# EAGLE board BSPD (EAGLE 8.6.2)
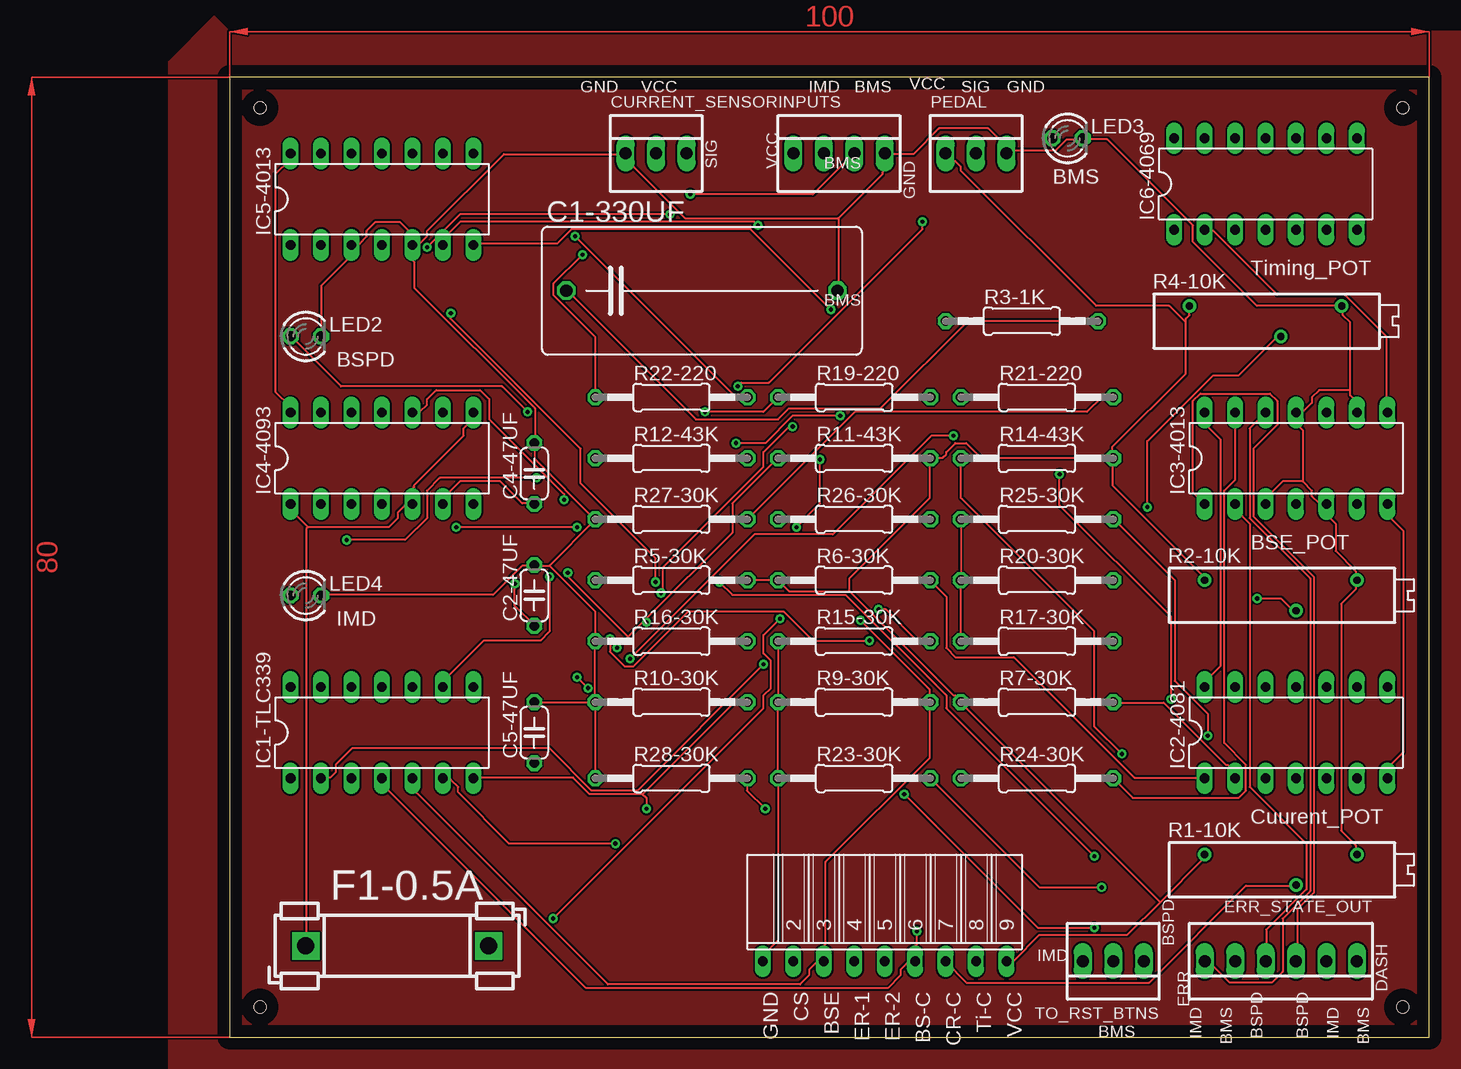
[diagram p0: board, top side]
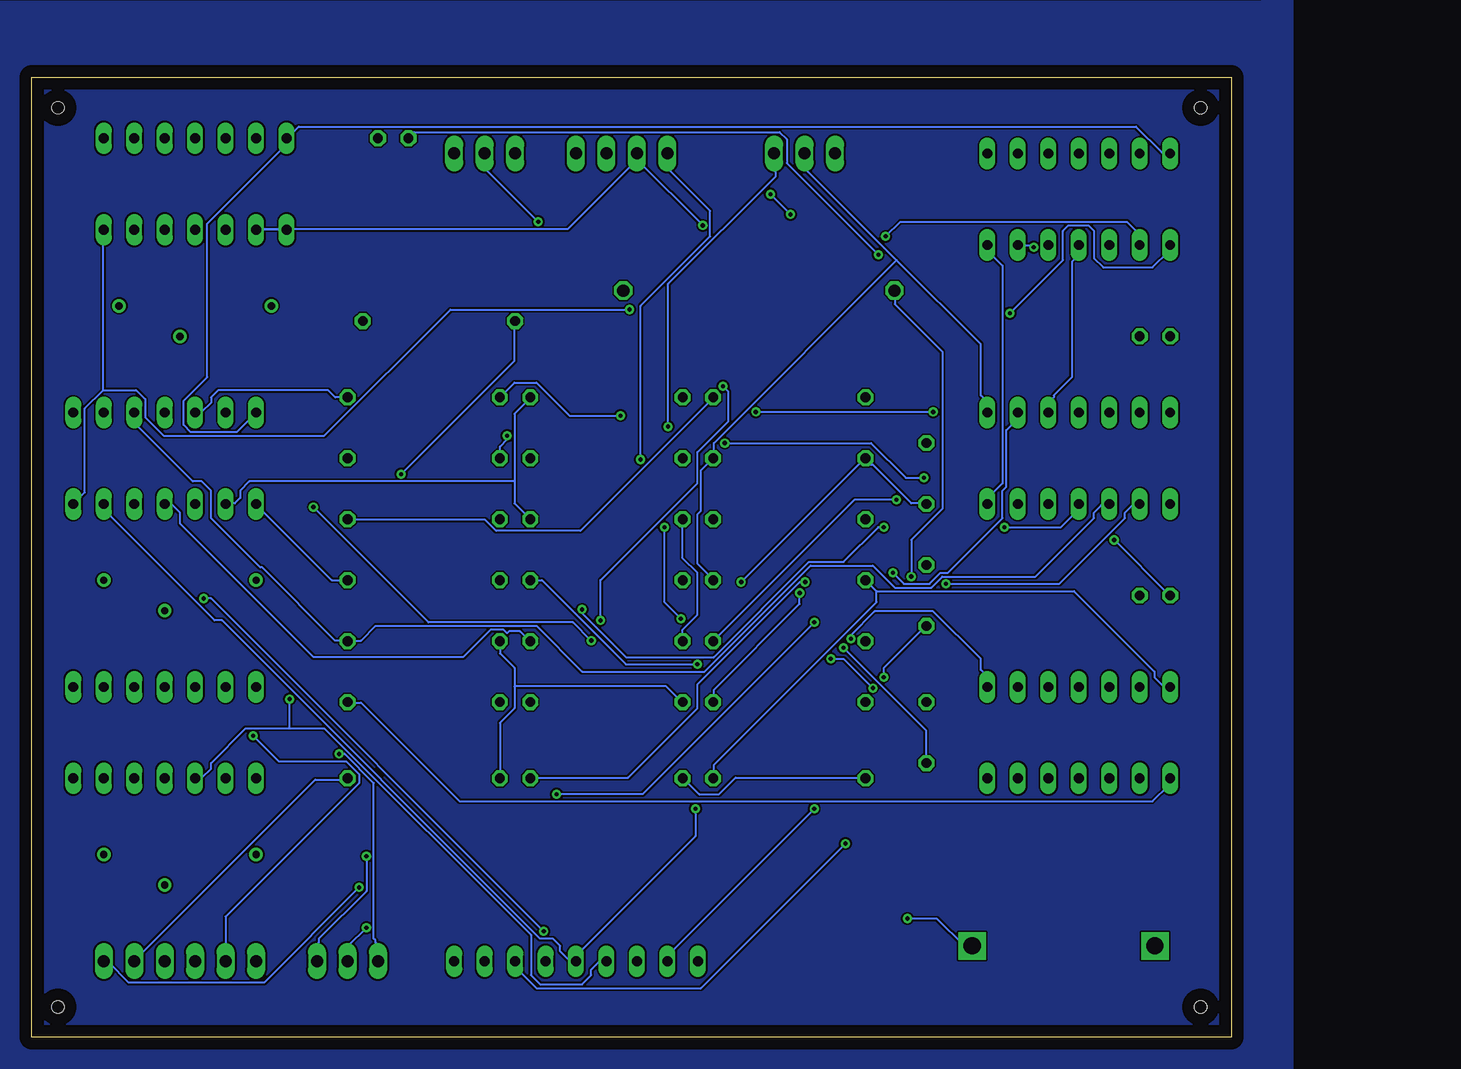
[diagram p1: board, bottom side, seen from below]

Size 100 x 80 mm. Coordinates in mm from the lower left corner, seen from the top.
Outline: 0,0 100,0 100,80 0,80 0,0
Copper layers (1*16): Top 0.035mm / dielectric 1.5mm / Bottom 0.035mm
Design rules "default": minimum track width 6mil, minimum drill 0.35mm, track to track 6mil, track to pad 6mil, pad to pad 6mil, via to via 6mil, smd to smd 6mil, copper to edge 40mil, drill to drill 6mil, minimum pad ring 10mil, minimum via ring 8mil, stop-mask expansion 4mil, vias tented up to drill 0mil, thermal gap 10mil
Holes 1 mm at 2.54,77.47 2.54,2.54 97.79,77.47 97.79,2.54

## Footprints (pad centres in the part's own frame; a part is rotated, then mirrored left to right if it is on the bottom)
C225-108X268 = drill 1.016 octagon: 1 -11.303,0; 2 11.303,0
C050-024X044 = drill 0.813 octagon: 1 -2.54,0; 2 2.54,0
22-23-2031 = drill 1 long: 1 -2.54,0; 2 0,0; 3 2.54,0
22-23-2061 = drill 1 long: 1 -6.35,0; 2 -3.81,0; 3 -1.27,0; 4 1.27,0; 5 3.81,0; 6 6.35,0
FUSE_HOLDER_5X20MM = drill 1.422 pad 2.286 square: 1 0,0; 2 15.24,0
FE09W = drill 0.813 long: 1 -10.16,0; 2 -7.62,0; 3 -5.08,0; 4 -2.54,0; 5 0,0; 6 2.54,0; 7 5.08,0; 8 7.62,0; 9 10.16,0
DIL14 = drill 0.813 long: 1 -7.62,-3.81; 2 -5.08,-3.81; 3 -2.54,-3.81; 4 0,-3.81; 5 2.54,-3.81; 6 5.08,-3.81; 7 7.62,-3.81; 8 7.62,3.81; 9 5.08,3.81; 10 2.54,3.81; 11 0,3.81; 12 -2.54,3.81; 13 -5.08,3.81; 14 -7.62,3.81
22-23-2041 = drill 1 long: 1 -3.81,0; 2 -1.27,0; 3 1.27,0; 4 3.81,0
LED3MM = drill 0.813 octagon: A -1.27,0; K 1.27,0
RTRIM3006P = drill 0.61: 1 -7.62,1.27; 2 0,-1.27; 3 5.08,1.27
0207/12 = drill 0.813 octagon: 1 -6.35,0; 2 6.35,0

## Placement (x,y rotation side)
C1-330UF  330u  [C225-108X268]  39.37,62.23 0 top
C2-47UF  47uF  [C050-024X044]  25.4,36.83 90 top
C4-47UF  47uF  [C050-024X044]  25.4,46.99 90 top
C5-47UF  47uF  [C050-024X044]  25.4,25.4 90 top
CURRENT_SENSOR  22-23-2031  [22-23-2031]  35.56,73.66 0 top
ERR_STATE_OUT  ERR_STATE_OUT  [22-23-2061]  87.63,6.35 180 top
F1-0.5A  FUSEBLANK_5X20MM  [FUSE_HOLDER_5X20MM]  6.35,7.62 0 top
GND  [FE09W]  54.61,6.35 0 top
IC1-TLC339  TLC339P  [DIL14]  12.7,25.4 0 top
IC2-4081  4081N  [DIL14]  88.9,25.4 0 top
IC3-4013  4013N  [DIL14]  88.9,48.26 0 top
IC4-4093  4093N  [DIL14]  12.7,48.26 0 top
IC5-4013  4013N  [DIL14]  12.7,69.85 0 top
IC6-4069  4069N  [DIL14]  86.36,71.12 0 top
INPUTS  22-23-2041  [22-23-2041]  50.8,73.66 0 top
LED2  [LED3MM]  6.35,58.42 0 top
LED3  [LED3MM]  69.85,74.93 0 top
LED4  [LED3MM]  6.35,36.83 0 top
PEDAL  22-23-2031  [22-23-2031]  62.23,73.66 0 top
R1-10K  [RTRIM3006P]  88.9,13.97 0 top
R2-10K  [RTRIM3006P]  88.9,36.83 0 top
R3-1K  1k  [0207/12]  66.04,59.69 0 top
R4-10K  [RTRIM3006P]  87.63,59.69 0 top
R5-30K  30k  [0207/12]  36.83,38.1 0 top
R6-30K  30k  [0207/12]  52.07,38.1 0 top
R7-30K  30k  [0207/12]  67.31,27.94 0 top
R9-30K  30k  [0207/12]  52.07,27.94 0 top
R10-30K  30k  [0207/12]  36.83,27.94 0 top
R11-43K  43k  [0207/12]  52.07,48.26 0 top
R12-43K  43k  [0207/12]  36.83,48.26 0 top
R14-43K  43k  [0207/12]  67.31,48.26 0 top
R15-30K  30k  [0207/12]  52.07,33.02 0 top
R16-30K  30k  [0207/12]  36.83,33.02 0 top
R17-30K  30k  [0207/12]  67.31,33.02 0 top
R19-220  220  [0207/12]  52.07,53.34 0 top
R20-30K  30k  [0207/12]  67.31,38.1 0 top
R21-220  220  [0207/12]  67.31,53.34 0 top
R22-220  220  [0207/12]  36.83,53.34 0 top
R23-30K  30k  [0207/12]  52.07,21.59 0 top
R24-30K  30k  [0207/12]  67.31,21.59 0 top
R25-30K  30k  [0207/12]  67.31,43.18 0 top
R26-30K  30k  [0207/12]  52.07,43.18 0 top
R27-30K  30k  [0207/12]  36.83,43.18 0 top
R28-30K  30k  [0207/12]  36.83,21.59 0 top
TO_RST_BTNS  22-23-2031  [22-23-2031]  73.66,6.35 180 top

## Library data of the parts
C1-330UF C2-47UF C4-47UF C5-47UF = rcl; SPICEPREFIX: C
CURRENT_SENSOR PEDAL TO_RST_BTNS = con-molex; MF: MOLEX; MPN: 22-23-2031; OC_FARNELL: 1462950; OC_NEWARK: 30C0862
ERR_STATE_OUT = con-molex; MF: MOLEX; MPN: 22-23-2061; OC_FARNELL: 1462922; OC_NEWARK: 27C1933
F1-0.5A = fuse; OC_FARNELL: unknown; OC_NEWARK: unknown
GND = con-lsta; OC_FARNELL: unknown; OC_NEWARK: unknown
IC1-TLC339 = linear
IC2-4081 IC3-4013 IC4-4093 IC5-4013 IC6-4069 = 40xx
INPUTS = con-molex; MF: MOLEX; MPN: 22-23-2041; OC_FARNELL: 1462920; OC_NEWARK: 38C0355
LED2-LED4 = led
R1-10K R2-10K R4-10K = rcl; SPICEMODEL: X; SPICEPREFIXL: POT
R3-1K R5-30K R6-30K R7-30K R9-30K R10-30K R11-43K R12-43K R14-43K R15-30K R16-30K R17-30K R19-220 R20-30K R21-220 R22-220 R23-30K R24-30K R25-30K R26-30K R27-30K R28-30K = rcl; SPICEPREFIX: R

## Nets
BMS: IC5-4013.6 INPUTS.3
BMS_DASH: ERR_STATE_OUT.1 IC5-4013.1 R23-30K.2
BMS_ERR: ERR_STATE_OUT.5 IC5-4013.2 R22-220.2 R25-30K.2
BMS_RST: IC4-4093.10 IC5-4013.4 R16-30K.2
BSE: GND.3 IC1-TLC339.5 PEDAL.2 R9-30K.2
BSE_POT: GND.6 IC1-TLC339.4 R2-10K.2
BSPD_DASH: ERR_STATE_OUT.3 IC3-4013.1 R20-30K.2
BSPD_ERR: ERR_STATE_OUT.4 IC3-4013.2 R19-220.2 R26-30K.2
BSPD_RST: IC3-4013.4 IC4-4093.4 R15-30K.2
CURRENT_POT: GND.7 IC1-TLC339.6 R1-10K.2
CURRENT_SENSOR: CURRENT_SENSOR.3 GND.2 IC1-TLC339.7 R10-30K.2
ERROR_1: GND.4 IC2-4081.3 R3-1K.1
ERROR_2: GND.5 IC1-TLC339.14 IC3-4013.6 R5-30K.1 R28-30K.2
ESO_BMS_RST: C5-47UF.1 IC4-4093.9 R11-43K.1 TO_RST_BTNS.2
ESO_BSPD_RST: C4-47UF.1 IC4-4093.6 R12-43K.1 TO_RST_BTNS.1
ESO_IMD_RST: C2-47UF.1 IC4-4093.2 R14-43K.1 TO_RST_BTNS.3
GND: C1-330UF.2 C2-47UF.2 C4-47UF.2 C5-47UF.2 CURRENT_SENSOR.1 GND.1 IC3-4013.3 IC3-4013.5 IC3-4013.9 IC3-4013.11 IC5-4013.3 IC5-4013.5 INPUTS.4 LED2.K LED3.K LED4.K PEDAL.3 R1-10K.3 R2-10K.3 R4-10K.3 R9-30K.1 R10-30K.1 R15-30K.1 R16-30K.1 R17-30K.1 R20-30K.1 R23-30K.1 R24-30K.1 R25-30K.1 R26-30K.1 R27-30K.1 R28-30K.1
IMD: IC6-4069.1 INPUTS.2
IMD_DASH: ERR_STATE_OUT.2 IC3-4013.13 R24-30K.2
IMD_ERR: ERR_STATE_OUT.6 IC3-4013.12 R21-220.2 R27-30K.2
IMD_RST: IC3-4013.10 IC4-4093.3 R17-30K.2
N$1: IC1-TLC339.2 IC2-4081.1 R6-30K.2
N$2: IC1-TLC339.1 IC2-4081.2 R7-30K.2
N$4: F1-0.5A.2 INPUTS.1
N$5: IC3-4013.8 IC6-4069.2
N$6: C1-330UF.1 IC1-TLC339.9 R3-1K.2
N$9: LED3.A R22-220.1
N$15: LED4.A R21-220.1
N$21: LED2.A R19-220.1
TIME_POT: GND.8
TIMED_POT: IC1-TLC339.8 R4-10K.2
V+: IC1-TLC339.3
V-: IC1-TLC339.12
VCC: CURRENT_SENSOR.2 F1-0.5A.1 GND.9 IC4-4093.1 IC4-4093.5 IC4-4093.8 PEDAL.1 R1-10K.1 R2-10K.1 R4-10K.1 R5-30K.2 R6-30K.1 R7-30K.1 R11-43K.2 R12-43K.2 R14-43K.2
VDD: IC2-4081.14 IC3-4013.14 IC4-4093.14 IC5-4013.14 IC6-4069.14
VSS: IC2-4081.7 IC3-4013.7 IC4-4093.7 IC5-4013.7 IC6-4069.7

## Tracks (layer width: path | path; a pad name or v marks a point on that pad's centre or on a via)
BMS  (via drill 0.35)
  Top 0.152: v16.46,65.84 19.2,68.58 v36.73,68.58 | v38.41,70.26 48.62,70.26 51.97,73.61 INPUTS.3
  Bottom 0.152: v16.46,65.84 16.61,65.99 17.68,65.99 IC5-4013.6 | v38.41,70.26 v36.73,68.58
BMS_DASH  (via drill 0.35)
  Top 0.152: v18.44,60.35 18.44,59.89 29.26,49.07 29.26,46.18 35.51,39.93 v35.51,37.95 | v72.69,12.5 67.51,12.5 R23-30K.2
  Bottom 0.152: v18.44,60.35 14.02,64.77 14.02,67.21 13.56,67.67 11.89,67.67 11.43,67.21 11.43,64.92 10.67,64.16 6.55,64.16 5.18,65.53 5.18,65.99 IC5-4013.1 | v35.51,37.95 35.97,37.95 44.5,29.41 44.5,27.43 50.29,21.64 58.37,21.64 R23-30K.2 | v72.69,12.5 80.62,4.57 91.9,4.57 93.57,6.25 93.88,6.25 ERR_STATE_OUT.1
BMS_ERR  (via drill 0.35)
  Top 0.152: v28.8,66.75 42.22,53.34 R22-220.2 | v81.53,25.15 81.53,26.98 78.79,29.72 78.79,38.1 73.76,43.13 R25-30K.2
  Bottom 0.152: IC5-4013.2 7.62,66.9 8.69,67.97 27.58,67.97 v28.8,66.75 | R25-30K.2 73.61,43.13 62.18,43.13 61.27,42.22 54.25,42.22 43.13,53.34 R22-220.2 | ERR_STATE_OUT.5 83.82,10.06 72.69,21.18 72.69,21.95 73.76,23.01 79.4,23.01 v81.53,25.15
BMS_RST  (via drill 0.35)
  Top 0.152: v27.89,44.81 27.89,45.26 21.64,51.51 21.64,53.19 20.88,53.95 17.22,53.95 16.46,53.19 16.46,52.73 15.85,52.12 15.24,52.12 IC4-4093.10
  Bottom 0.152: IC4-4093.10 15.24,52.88 14.78,53.34 14.78,53.49 13.26,55.02 13.26,64.62 12.8,65.08 12.8,65.99 IC5-4013.4 | R16-30K.2 31.39,44.81 v27.89,44.81
BSE  (via drill 0.35)
  Top 0.152: IC1-TLC339.5 15.24,20.73 31.55,4.42 47.55,4.42 48.31,5.18 48.31,5.64 48.92,6.25 49.53,6.25 GND.3 49.53,7.62 49.68,7.77 49.68,14.63 58.37,23.32 58.37,27.89 R9-30K.2 58.37,28.04 58.37,28.96 v52.58,34.75 | v57.76,67.97 57.76,67.36 44.96,54.56 42.67,54.56 v42.37,54.25
  Bottom 0.152: v57.76,67.97 62.18,72.39 62.18,73.61 PEDAL.2 | v42.37,54.25 41.91,53.8 41.91,51.36 44.5,48.77 44.5,46.18 52.58,38.1 v52.58,34.75
BSE_POT  (via drill 0.35)
  Top 0.152: v85.65,36.58 87.63,36.58 88.54,35.66 88.85,35.66 R2-10K.2 | v57.3,8.84 57.3,7.77 57.15,7.62 GND.6 57.15,6.25 56.54,6.25 55.93,5.64 55.93,5.18 54.86,4.12 29.72,4.12 12.8,21.03 12.8,21.49 IC1-TLC339.4
  Bottom 0.152: v85.65,36.58 85.04,36.58 v57.3,8.84
BSPD_DASH
  Top 0.152: IC3-4013.1 80.31,45.41 80.31,53.03 80.92,53.65 86.72,53.65 87.33,53.03 87.33,51.05 85.34,49.07 85.34,43.43 90.37,38.41 90.37,12.04 89,10.67 89,6.4 ERR_STATE_OUT.3
  Bottom 0.152: R20-30K.2 74.98,38.1 81.23,44.35 IC3-4013.1
BSPD_ERR
  Top 0.152: IC3-4013.2 83.82,44.04 85.04,42.82 85.04,20.88 89.76,16.15 89.76,12.34 86.41,8.99 86.41,6.4 ERR_STATE_OUT.4
  Bottom 0.152: R26-30K.2 59.74,44.5 59.74,46.33 | 59.74,46.33 59.74,51.97 58.37,53.34 R19-220.2 | 59.74,46.33 81.84,46.33 82.6,45.57 82.6,44.96 83.06,44.5 83.82,44.5 IC3-4013.2
BSPD_RST  (via drill 0.35)
  Top 0.152: v28.96,42.52 v18.9,42.52 | v54.1,35.66 54.71,35.66 57.3,33.07 58.37,33.07 R15-30K.2
  Bottom 0.152: v18.9,42.52 14.17,42.52 12.8,43.89 12.8,44.35 IC4-4093.4 | v28.96,42.52 29.41,42.52 32.31,39.62 35.2,39.62 43.13,31.7 50.44,31.7 54.1,35.36 v54.1,35.66 | IC3-4013.4 88.85,44.35 88.24,44.35 87.63,43.74 87.63,42.82 76.5,31.7 64.01,31.7 61.72,33.98 60.66,33.98 60.35,33.68 60.2,33.83 59.28,33.83 58.52,33.07 R15-30K.2
CURRENT_POT  (via drill 0.35)
  Top 0.152: v32.16,16.15 23.32,16.15 19.05,20.42 19.05,20.88 18.44,21.49 17.83,21.49 IC1-TLC339.6 | R1-10K.2 88.85,12.65 84.73,12.65 76.66,4.57 61.42,4.57 59.74,6.25 GND.7
  Bottom 0.152: v32.16,16.15 44.2,4.12 57.91,4.12 59.59,5.79 59.59,6.25 GND.7
CURRENT_SENSOR  (via drill 0.35)
  Top 0.152: 34.44,20.27 30.02,20.27 28.65,21.64 20.42,21.64 IC1-TLC339.7 | 34.44,20.27 42.06,27.89 43.13,27.89 R10-30K.2 | v34.75,19.05 34.75,19.96 34.44,20.27 | v46.94,50.9 46.63,50.9 44.5,48.77 44.5,47.55 36.12,39.17 36.12,37.19 v35.97,37.03
  Bottom 0.152: v34.75,19.05 46.94,6.86 46.94,6.4 GND.2 | CURRENT_SENSOR.3 38.1,72.24 37.95,72.08 37.95,71.78 46.94,62.79 v46.94,50.9 | v35.97,37.03 35.97,36.12 43.13,28.96 43.13,28.04 R10-30K.2
ERROR_1  (via drill 0.35)
  Top 0.152: v69.19,46.94 69.19,44.35 78.49,35.05 v78.49,28.19
  Bottom 0.152: 78.49,25.76 82.14,25.76 85.04,22.86 85.04,22.4 85.8,21.64 86.26,21.64 IC2-4081.3 | 78.49,25.76 75.59,25.76 58.37,8.53 58.37,5.18 57.61,4.42 54.1,4.42 53.34,5.18 53.34,5.64 52.73,6.25 52.12,6.25 GND.4 | v69.19,46.94 59.74,56.39 59.74,59.59 R3-1K.1 | 78.49,25.76 v78.49,28.19
ERROR_2  (via drill 0.35)
  Top 0.152: v44.65,19.05 43.13,20.57 43.13,21.49 R28-30K.2
  Bottom 0.152: 29.57,37.19 13.11,37.19 6.4,30.48 6.4,30.02 5.64,29.26 5.18,29.26 IC1-TLC339.14 | R5-30K.1 29.57,37.19 | v44.65,19.05 44.65,16.76 54.56,6.86 54.56,6.4 GND.5 54.71,6.4 55.17,6.4 55.93,7.16 55.93,7.62 56.54,8.23 57.61,8.23 84.12,34.75 84.73,34.75 93.88,43.89 93.88,44.35 IC3-4013.6 | 29.57,37.19 29.57,36.27 43.13,22.71 43.13,21.64 R28-30K.2
ESO_BMS_RST  (via drill 0.35)
  Top 0.152: 34.59,34.75 41.91,42.06 41.91,44.5 45.72,48.31 R11-43K.1 | 34.59,34.75 33.22,33.38 | 33.22,33.38 v32.31,32.46 | v28.19,38.71 28.19,38.41 33.22,33.38 | v72.08,9.14 67.36,9.14 v56.24,20.27 | 34.59,34.75 v34.75,34.59
  Bottom 0.152: v32.31,32.46 25.45,25.6 25.45,22.86 C5-47UF.1 | v28.19,38.71 27.28,37.8 25.15,37.8 24.23,38.71 23.62,38.71 19.05,43.28 19.05,45.57 18.75,45.87 18.75,50.6 17.83,51.51 17.83,51.97 IC4-4093.9 | v72.08,9.14 73.61,7.62 73.61,6.4 TO_RST_BTNS.2 | v56.24,20.27 49.07,20.27 v34.75,34.59
ESO_BSPD_RST  (via drill 0.35)
  Top 0.152: IC4-4093.6 17.83,44.5 17.83,44.96 19.2,46.33 22.55,46.33 24.38,44.5 25.3,44.5 C4-47UF.1 | v72.08,15.09 59.74,27.43 59.74,28.5 51.36,36.88 41.91,36.88 v40.84,37.95
  Bottom 0.152: C4-47UF.1 25.45,44.5 26.67,44.5 29.87,47.7 30.02,47.7 30.48,48.16 R12-43K.1 30.48,48.31 v40.84,37.95 | TO_RST_BTNS.1 76.2,7.77 76.05,7.92 76.05,8.23 72.08,12.19 v72.08,15.09
ESO_IMD_RST  (via drill 0.35)
  Top 0.152: v23.77,37.8 23.77,35.97 25.45,34.29 C2-47UF.1 | R14-43K.1 60.96,44.96 72.08,33.83 72.08,25.91 v74.37,23.62 | v29.87,29.11 v28.96,30.02 | v33.38,31.55 43.74,41.91 50.29,41.91 58.52,50.14 v60.35,50.14
  Bottom 0.152: v23.77,37.8 14.33,37.8 8.84,43.28 8.84,43.74 8.23,44.35 7.62,44.35 IC4-4093.2 | v74.37,23.62 73.91,23.62 71.48,21.18 71.48,8.23 71.32,8.08 71.32,7.92 71.17,7.77 71.17,6.4 TO_RST_BTNS.3 | v28.96,30.02 28.96,30.79 25.45,34.29 C2-47UF.1 | v29.87,29.11 32.31,31.55 v33.38,31.55 | v60.35,50.14 60.35,49.84 60.96,49.23 R14-43K.1
GND
  Top 0.152: 30.48,27.89 R28-30K.1 | 30.48,27.89 25.45,27.89 C5-47UF.2 | 30.48,27.89 R10-30K.1 R16-30K.1 30.48,35.51 26.67,39.32 | LED4.K 7.62,36.88 21.95,36.88 24.38,39.32 25.3,39.32 C2-47UF.2 25.45,39.32 26.67,39.32 | 26.67,39.32 30.48,43.13 | 25.45,49.53 25.45,48.16 30.48,43.13 | 30.48,43.13 R27-30K.1 | R25-30K.1 R20-30K.1 R17-30K.1 | R15-30K.1 R9-30K.1 R23-30K.1 45.72,8.08 44.5,6.86 44.5,6.4 GND.1 | 93.88,38.1 93.88,37.34 92.66,36.12 92.66,17.22 93.88,16 93.88,15.24 R1-10K.3 | 89.46,46.33 87.78,46.33 86.41,44.96 86.41,44.5 IC3-4013.3 | 89.46,46.33 90.22,45.57 90.22,45.11 90.83,44.5 91.44,44.5 IC3-4013.5 91.44,43.59 92.2,42.82 92.2,40.54 93.88,38.86 93.88,38.1 | 93.42,53.95 93.42,53.49 93.88,53.03 93.88,52.12 IC3-4013.9 | 93.42,53.95 93.42,59.59 92.81,60.2 92.81,60.96 R4-10K.3 85.65,60.96 80.31,66.29 80.31,67.67 73.15,74.83 71.17,74.83 LED3.K 71.02,74.83 69.8,74.83 68.89,73.91 64.77,73.91 | 93.42,53.95 90.83,53.95 90.22,53.34 90.22,52.88 89.46,52.12 89,52.12 IC3-4013.11 89,51.97 89,51.05 89.46,50.6 89.46,46.33 | 93.88,38.1 R2-10K.3 | 64.77,73.91 64.77,74.22 63.25,75.74 59.13,75.74 57,73.61 54.71,73.61 INPUTS.4 54.56,73.61 54.56,72.24 54.41,72.08 54.41,71.93 50.75,68.28 | 50.75,68.28 50.75,62.33 C1-330UF.2 | LED2.K 7.62,62.64 10.06,65.08 10.06,65.99 IC5-4013.3 10.21,66.14 10.82,66.14 11.43,66.75 11.43,67.21 12.19,67.97 14.17,67.97 15.24,66.9 15.24,66.14 | 15.24,66.14 15.85,66.14 16.46,66.75 16.46,67.21 22.86,73.61 32.92,73.61 CURRENT_SENSOR.1 33.07,73.61 33.07,73.15 37.95,68.28 50.75,68.28 | 15.24,66.14 IC5-4013.5 15.24,64.77 15.39,64.62 15.39,62.48 25.45,52.43 25.45,49.53
  Top 0.152: 25.45,49.53 C4-47UF.2 | 64.77,73.91 PEDAL.3
  Bottom 0.152: R24-30K.1 60.96,26.21 59.74,27.43 59.74,29.26 | 59.74,29.26 59.74,30.79 60.96,32 R17-30K.1 | R26-30K.1 45.72,39.93 44.5,38.71 44.5,35.2 45.72,33.98 R15-30K.1 | 59.74,29.26 47.09,29.26 45.72,27.89 R9-30K.1 | R28-30K.1 30.48,21.64 41.3,21.64 42.67,20.27 44.35,20.27 45.72,21.64 R23-30K.1
IMD  (via drill 0.35)
  Top 0.152: 17.83,66.14 17.83,66.6 19.2,67.97 43.74,67.97 v44.04,67.67
  Bottom 0.152: 49.53,73.15 v44.04,67.67 | 49.53,73.15 INPUTS.2 49.53,73.61 | 49.53,73.15 55.32,67.36 81.23,67.36 IC6-4069.1
IMD_DASH
  Top 0.152: IC3-4013.13 83.82,46.48 82.91,45.57 82.91,24.54 84.73,22.71 84.73,20.57 84.12,19.96 75.29,19.96 R24-30K.2
  Bottom 0.152: R24-30K.2 73.76,21.49 76.35,21.49 91.44,6.4 ERR_STATE_OUT.2
IMD_ERR
  Top 0.152: R27-30K.2 52.12,52.12 71.48,52.12 72.69,53.34 R21-220.2 | IC3-4013.12 85.04,50.75 85.04,43.28 90.07,38.25 90.07,12.19 87.78,9.91 87.78,5.49 86.87,4.57 83.36,4.57 81.69,6.25 81.38,6.25 ERR_STATE_OUT.6
  Bottom 0.152: R21-220.2 74.68,53.34 75.29,53.95 84.43,53.95 85.04,53.34 85.04,52.88 85.8,52.12 86.26,52.12 IC3-4013.12
IMD_RST
  Bottom 0.152: IC4-4093.3 10.21,44.35 10.82,44.35 11.43,43.74 11.43,43.28 16.31,38.41 24.08,38.41 24.99,37.49 28.04,37.49 29.87,39.32 35.05,39.32 43.89,30.48 54.1,30.48 57.91,34.29 71.32,34.29 72.54,33.07 73.61,33.07 R17-30K.2 73.76,33.07 74.68,33.07 80.77,39.17 80.92,39.17 85.04,43.28 85.04,45.57 85.8,46.33 86.56,46.33 91.44,51.21 IC3-4013.10
N$1  (via drill 0.35)
  Top 0.152: v44.5,31.09 33.98,20.57 30.18,20.57 26.67,24.08 10.21,24.08 8.84,22.71 8.84,22.1 8.38,21.64 7.62,21.64 IC1-TLC339.2 | IC2-4081.1 81.23,21.64 75.44,21.64 65.38,31.7 60.5,31.7 59.74,32.46 59.74,36.73 58.37,38.1 R6-30K.2
  Bottom 0.152: v44.5,31.09 50.44,31.09 57.45,38.1 R6-30K.2
N$2
  Top 0.152: IC2-4081.2 83.82,22.1 83.21,22.71 83.06,22.71 77.88,27.89 73.76,27.89 R7-30K.2
  Bottom 0.152: IC1-TLC339.1 5.18,21.49 5.18,21.03 6.55,19.66 64.31,19.66 72.54,27.89 73.61,27.89 R7-30K.2
N$3
  pour Top: -1.27,85.09 -5.08,81.28 -5.08,-2.54 -3.81,-3.81 104.14,-3.81 104.14,83.82 0,83.82
N$4  (via drill 0.35)
  Top 0.152: v49.23,48.16 49.23,44.5 v47.24,42.52 | v45.87,34.9 44.5,33.53 44.5,32 45.11,31.39 45.11,29.11 44.5,28.5 44.5,27.43 v26.98,9.91
  Bottom 0.152: v49.23,48.16 49.23,60.96 43.43,66.75 43.43,68.89 46.94,72.39 46.94,73.61 INPUTS.1 | v47.24,42.52 47.24,36.27 v45.87,34.9 | v26.98,9.91 24.54,9.91 22.25,7.62 F1-0.5A.2
N$5
  Top 0.152: IC6-4069.2 81.38,67.21 81.99,67.21 87.33,61.87 92.96,61.87 96.47,58.37 96.47,52.12 IC3-4013.8
N$6  (via drill 0.35)
  Top 0.152: v26.67,38.41 26.67,33.83 25.91,33.07 21.18,33.07 17.83,29.72 17.83,29.26 IC1-TLC339.9 | R3-1K.2 72.39,59.74 61.57,59.74 54.25,52.43 46.63,52.43 45.72,51.51 38.86,51.51 28.19,62.18 C1-330UF.1
  Bottom 0.152: v26.67,38.41 26.67,41.45 24.08,44.04 24.08,57.15 28.04,61.11 28.04,62.18 C1-330UF.1
N$7
  pour Bottom: -5.08,88.9 -5.08,-5.08 104.14,-5.08 106.68,-2.54 106.68,86.36 -2.54,86.36
N$9  (via drill 0.35)
  Top 0.152: R22-220.1 30.48,58.37 26.98,61.87 26.98,62.79 v29.41,65.23
  Bottom 0.152: v29.41,65.23 37.03,72.85 37.03,74.83 37.64,75.44 68.12,75.44 68.58,74.98 LED3.A
N$15  (via drill 0.35)
  Top 0.152: v9.75,41.45 14.63,41.45 16.46,43.28 16.46,45.57 17.53,46.63 v25.6,46.63 | v42.22,49.53 44.65,49.53 46.94,51.82 v50.9,51.82
  Bottom 0.152: v9.75,41.45 5.18,36.88 LED4.A | v25.6,46.63 27.13,46.63 30.02,49.53 v42.22,49.53 | v50.9,51.82 55.17,51.82 57.91,54.56 59.74,54.56 R21-220.1
N$21  (via drill 0.35)
  Top 0.152: v24.84,52.12 22.71,54.25 9.3,54.25 5.18,58.37 LED2.A | v39.62,52.12 44.5,52.12 R19-220.1
  Bottom 0.152: v39.62,52.12 v24.84,52.12
TIMED_POT  (via drill 0.35)
  Top 0.152: v76.5,44.2 76.5,49.68 81.99,55.17 84.12,55.17 87.33,58.37 87.63,58.37 R4-10K.2 | v53.34,33.07 48.62,33.07 46.18,35.51 38.25,35.51 33.68,30.94 32.92,30.94 31.7,32.16 v31.7,33.22
  Bottom 0.152: v76.5,44.2 66.9,34.59 54.86,34.59 v53.34,33.07 | v31.7,33.22 31.7,33.53 29.72,35.51 24.84,35.51 20.88,31.55 20.88,30.63 20.42,30.18 20.42,29.26 IC1-TLC339.8
VCC
  Top 0.152: 6.55,42.52 5.18,43.89 5.18,44.35 IC4-4093.1 | 6.55,42.52 13.26,42.52 14.02,43.28 14.02,43.74 14.63,44.35 15.24,44.35 IC4-4093.5 15.24,45.72 15.39,45.87 15.39,46.02 19.51,50.14 19.51,50.75 20.27,51.51 20.27,51.97 IC4-4093.8 | 6.55,42.52 6.4,42.37 6.4,7.62 F1-0.5A.1 | R2-10K.1 81.23,38.1 81.23,38.41 73.61,46.02 73.61,48.16 R14-43K.2 73.61,48.31 | R4-10K.1 80.01,60.2 79.7,59.89 79.7,59.59 | 79.7,59.59 79.7,55.32 73.61,49.23 73.61,48.31 | PEDAL.1 60.35,73 60.5,73 60.96,72.54 60.96,72.24 72.24,60.96 78.33,60.96 79.7,59.59 | 77.57,11.28 74.83,8.53 67.51,8.53 65.38,6.4 64.77,6.4 GND.9 | 77.57,11.28 81.23,14.94 81.23,15.24 R1-10K.1 | R5-30K.2 R6-30K.1 46.63,37.19 51.66,37.19 | 51.66,37.19 60.35,28.5 60.5,28.5 60.96,28.04 R7-30K.1 60.96,27.89 77.57,11.28 | 51.66,37.19 51.66,38.25 58.37,44.96 58.37,48.16 R11-43K.2 58.52,48.31 59.44,48.31 59.74,48.62 59.74,48.77 60.5,49.53 61.42,49.53 62.64,48.31 73.61,48.31
  Bottom 0.152: 27.89,64.77 20.88,57.76 20.88,53.49 20.42,53.03 20.42,52.12 IC4-4093.8 | 27.89,64.77 35.51,72.39 35.51,73.61 CURRENT_SENSOR.2 | R5-30K.2 43.13,38.1 44.5,39.47 44.5,43.59 44.2,43.89 44.2,47.24 R12-43K.2 43.13,48.31 43.13,49.53 27.89,64.77
VDD
  Top 0.152: IC4-4093.14 5.03,52.12 5.03,52.58 3.81,53.8 3.81,71.93 5.03,73.15 5.03,73.61 IC5-4013.14 | IC2-4081.14 81.38,29.26 81.38,29.72 82.6,30.94 82.6,49.84 81.38,51.05 81.38,51.97 IC3-4013.14
  Bottom 0.152: IC3-4013.14 82.91,50.44 86.72,50.44 87.33,51.05 87.33,53.03 85.34,55.02 85.34,67.82 78.79,74.37 78.79,74.83 IC6-4069.14 78.64,74.98 77.72,75.89 7.92,75.89 5.79,73.76 5.18,73.76 IC5-4013.14
VSS  (via drill 0.35)
  Top 0.152: IC2-4081.7 96.62,21.64 96.62,22.55 97.84,23.77 97.84,42.22 96.62,43.43 96.62,44.35 IC3-4013.7 | v50.14,60.66 43.43,67.36 28.5,67.36 27.28,66.14 20.42,66.14 IC5-4013.7
  Bottom 0.152: IC4-4093.7 20.27,44.5 20.27,44.96 19.05,46.18 19.05,64.31 20.27,65.53 20.27,65.99 IC5-4013.7 | 94.03,53.95 94.03,67.21 IC6-4069.7 | 94.03,53.95 95.56,52.43 95.56,45.41 IC3-4013.7 | v50.14,60.66 65.08,60.66 75.59,50.14 89,50.14 90.53,51.66 90.53,53.19 91.29,53.95 94.03,53.95
(copper drawn outside any net)
  shapes: Top area x2

## Text on the board
tNames: VCC | GND | VCC | IMD | BMS | SIG | GND | SIG | VCC | BMS | BMS | GND | Timing_POT | BMS | BSPD | BSE_POT | IMD | Cuurent_POT | BSPD | IMD | CS | BSE | ER-1 | ER-2 | BS-C | CR-C | Ti-C | VCC | BSPD | BSPD | DASH | ERR | IMD | BMS | IMD | BMS | BMS